# EAGLE board ZEGAR_WS2812 (EAGLE 9.6.0)
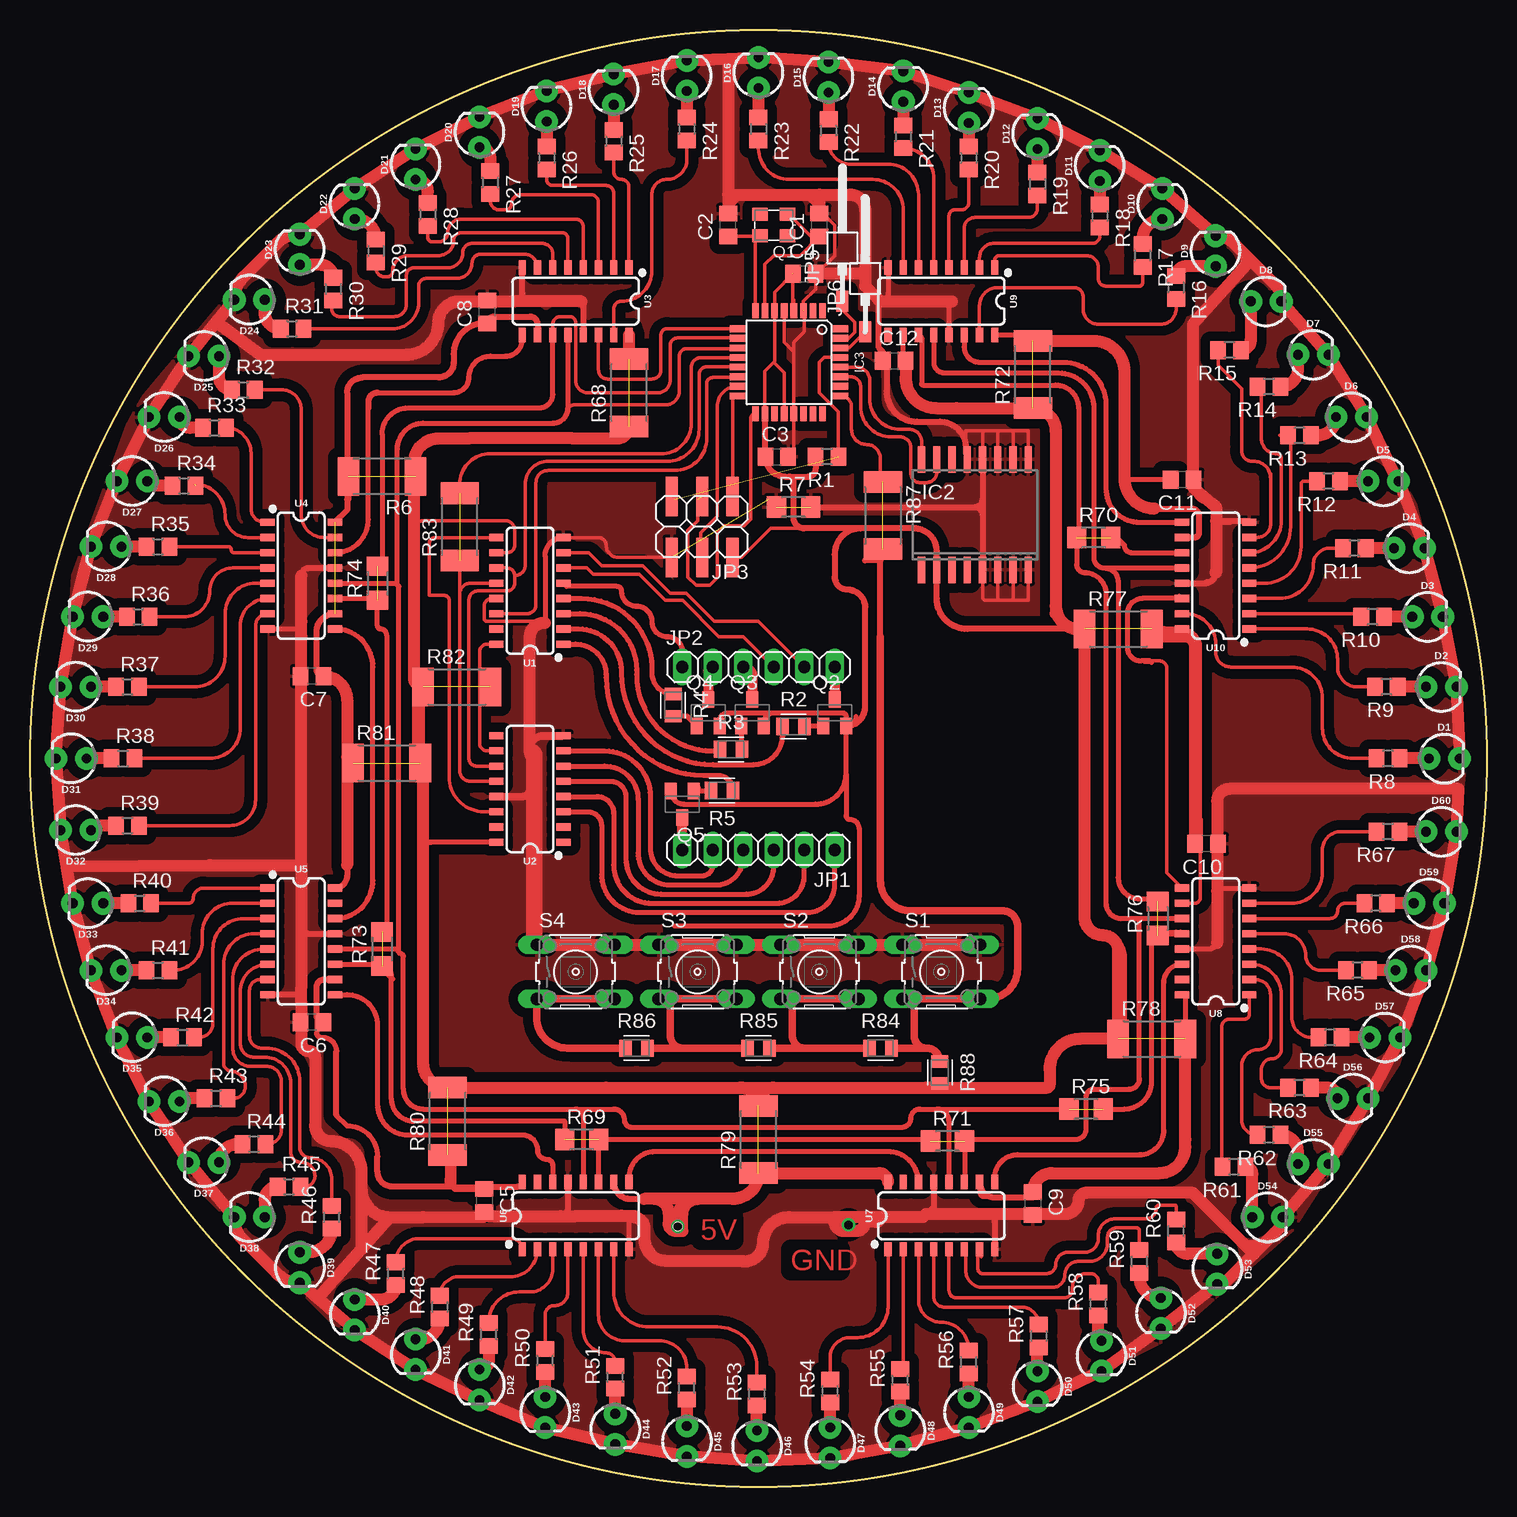
[diagram p0: board, top side]
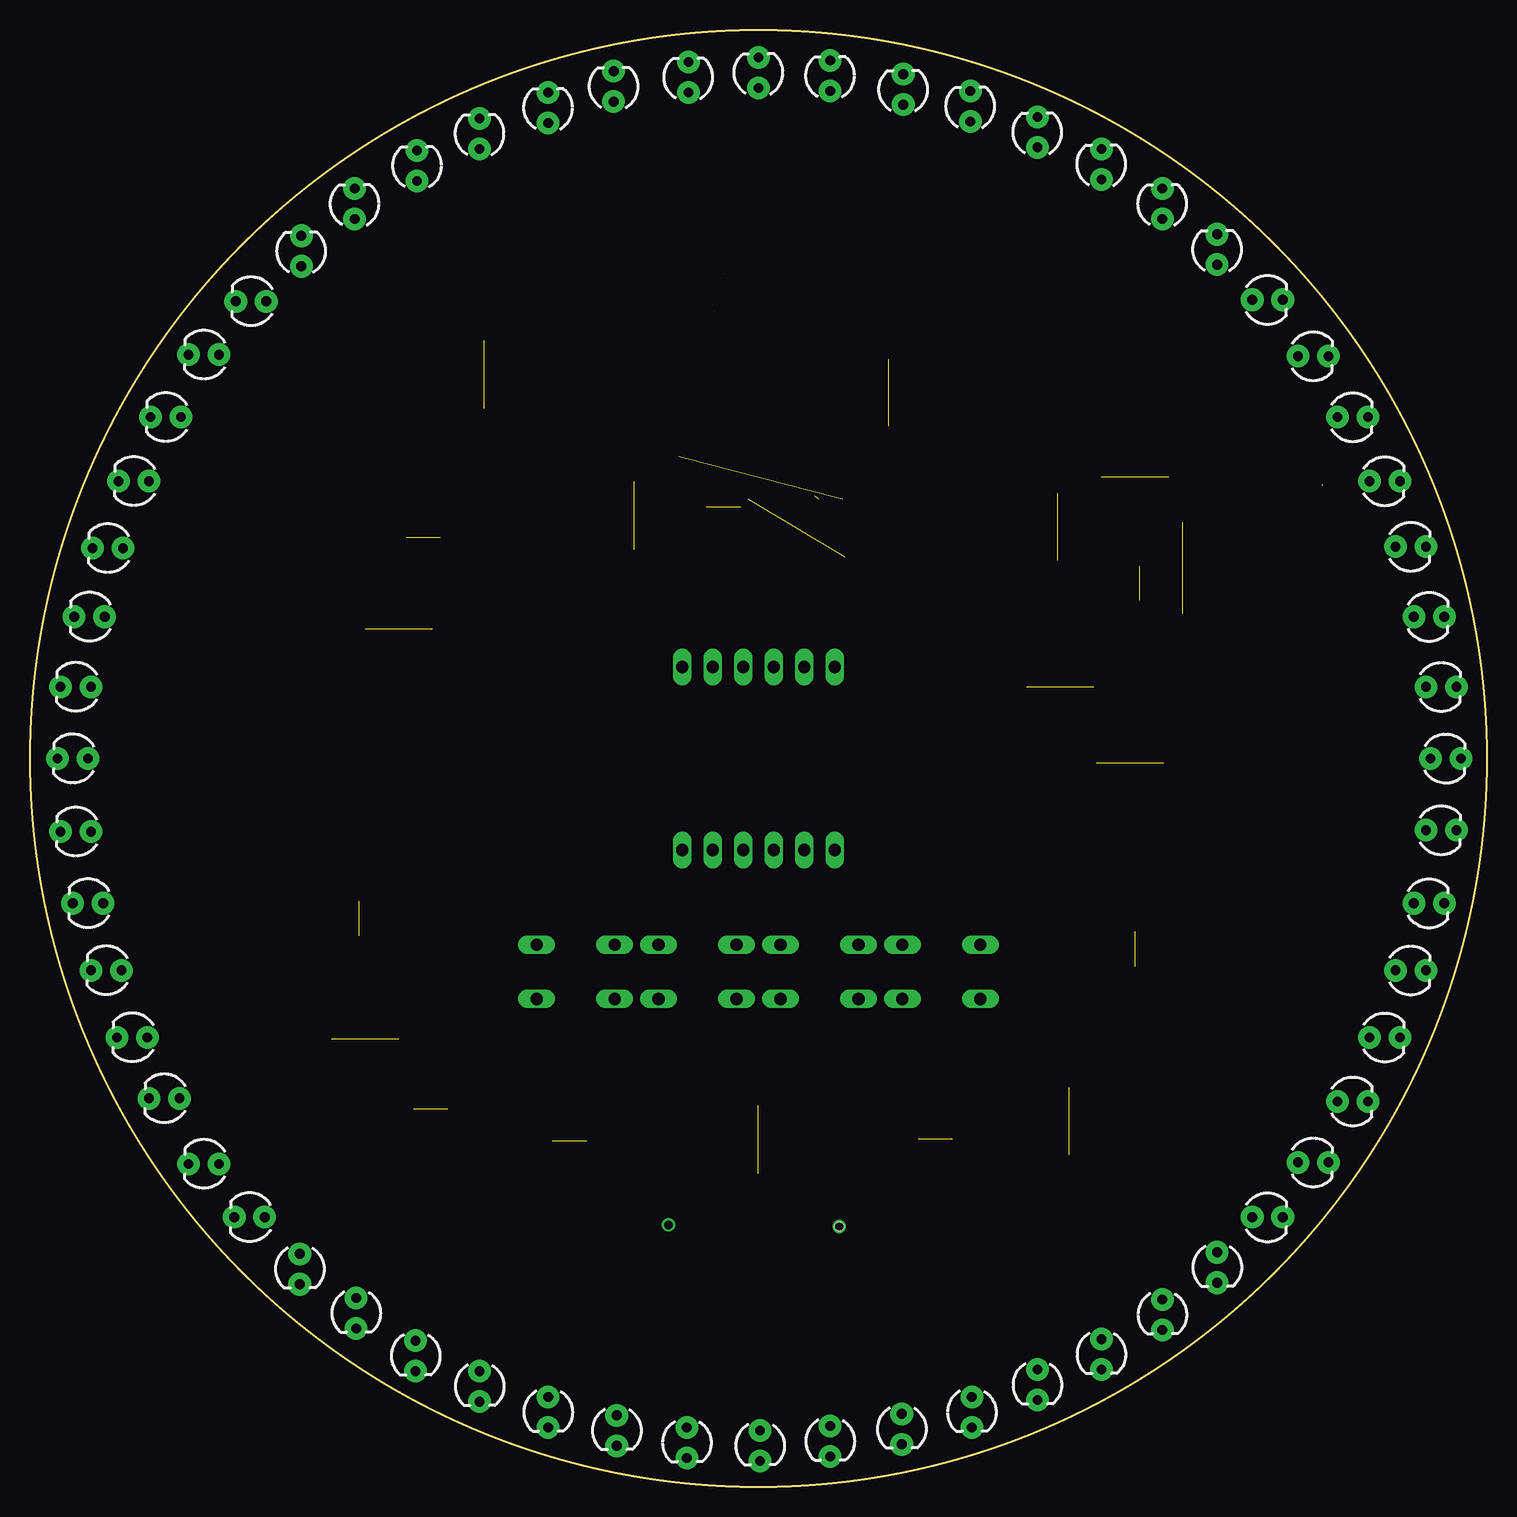
[diagram p1: board, bottom side, seen from below]

Size 121.42 x 121.42 mm. Coordinates in mm from the lower left corner, seen from the top.
Outline: circle at 60.71,60.71 radius 60.71
Copper layers (1*16): Top 0.035mm / dielectric 1.5mm / Bottom 0.035mm
Design rules "default": minimum track width 6mil, minimum drill 0.35mm, track to track 6mil, track to pad 6mil, pad to pad 6mil, via to via 6mil, smd to smd 6mil, copper to edge 40mil, drill to drill 6mil, minimum pad ring 10mil, minimum via ring 8mil, stop-mask expansion 4mil, vias tented up to drill 0mil, thermal gap 10mil
Holes 0.7 mm at 53.98,21.72

## Footprints (pad centres in the part's own frame; a part is rotated, then mirrored left to right if it is on the bottom)
C0805 = smd 1.3 x 1.5: 1 -0.95,0; 2 0.95,0
LED_3MM = drill 0.813 pad 1.88: A -1.27,0; K 1.27,0
SO16W = smd 0.6 x 2.2: 1 -4.445,-4.6; 2 -3.175,-4.6; 3 -1.905,-4.6; 4 -0.635,-4.6; 5 0.635,-4.6; 6 1.905,-4.6; 7 3.175,-4.6; 8 4.445,-4.6; 9 4.445,4.6; 10 3.175,4.6; 11 1.905,4.6; 12 0.635,4.6; 13 -0.635,4.6; 14 -1.905,4.6; 15 -3.175,4.6; 16 -4.445,4.6
TQFP32-08 = smd 1.27 x 0.559: 1 -4.293,2.8; 2 -4.293,2; 3 -4.293,1.2; 4 -4.293,0.4; 5 -4.293,-0.4; 6 -4.293,-1.2; 7 -4.293,-2; 8 -4.293,-2.8; 17 4.293,-2.8; 18 4.293,-2; 19 4.293,-1.2; 20 4.293,-0.4; 21 4.293,0.4; 22 4.293,1.2; 23 4.293,2; 24 4.293,2.8 | smd 0.559 x 1.27: 9 -2.8,-4.293; 10 -2,-4.293; 11 -1.2,-4.293; 12 -0.4,-4.293; 13 0.4,-4.293; 14 1.2,-4.293; 15 2,-4.293; 16 2.8,-4.293; 25 2.8,4.293; 26 2,4.293; 27 1.2,4.293; 28 0.4,4.293; 29 -0.4,4.293; 30 -1.2,4.293; 31 -2,4.293; 32 -2.8,4.293
1X06 = drill 1.016 long: 1 -6.35,0; 2 -3.81,0; 3 -1.27,0; 4 1.27,0; 5 3.81,0; 6 6.35,0
2X03SMD = smd 1.016 x 3.302: 1 -1.27,-3.81; 2 -1.27,1.27; 3 1.27,-3.81; 4 1.27,1.27; 5 3.81,-3.81; 6 3.81,1.27
1X01SMD/90 = smd 1.016 x 1.778: 1 -1.27,-5.08
3.2X2.5_KX-7 = smd 1.3 x 1.1: 1 -1.15,-0.9; 2 1.15,-0.9; 3 1.15,0.9; 4 -1.15,0.9
SOT23-BEC = smd 1 x 1.4: B -0.95,-1.1; C 0,1.1; E 0.95,-1.1
R0805 = smd 1.3 x 1.5: 1 -0.95,0; 2 0.95,0
RESC2012X65 = smd 1.031 x 1.42: 1 -0.919,0; 2 0.919,0
R2512 = smd 1.8 x 3.2: 1 -2.8,0; 2 2.8,0
R1206 = smd 1.6 x 1.803: 1 -1.422,0; 2 1.422,0
B3F-10XX = drill 1.016 long: 1 -3.251,2.261; 2 3.251,2.261; 3 -3.251,-2.261; 4 3.251,-2.261
SO16 = smd 0.6 x 1.2: 1 -4.445,-2.8; 2 -3.175,-2.8; 3 -1.905,-2.8; 4 -0.635,-2.8; 5 0.635,-2.8; 6 1.905,-2.8; 7 3.175,-2.8; 8 4.445,-2.8; 9 4.445,2.8; 10 3.175,2.8; 11 1.905,2.8; 12 0.635,2.8; 13 -0.635,2.8; 14 -1.905,2.8; 15 -3.175,2.8; 16 -4.445,2.8

## Placement (x,y rotation side)
C1  22p  [C0805]  65.79,105.16 90 top
C2  22p  [C0805]  58.17,105.16 90 top
C3  100n  [C0805]  62.23,85.85 0 top
C4  100n  [C0805]  64.52,101.09 0 top
C5  100n  [C0805]  37.85,23.88 270 top
C6  100n  [C0805]  23.5,38.74 180 top
C7  100n  [C0805]  23.5,67.57 180 top
C8  100n  [C0805]  38.1,97.92 90 top
C9  100n  [C0805]  83.57,23.62 270 top
C10  100n  [C0805]  98.05,53.6 180 top
C11  100n  [C0805]  96.01,83.95 180 top
C12  100n  [C0805]  72.01,93.86 0 top
D1  [LED_3MM]  117.86,60.71 0 top
D2  [LED_3MM]  117.6,66.68 0 top
D3  [LED_3MM]  116.46,72.52 0 top
D4  [LED_3MM]  114.94,78.23 0 top
D5  [LED_3MM]  112.78,83.82 0 top
D6  [LED_3MM]  110.11,89.16 0 top
D7  [LED_3MM]  106.94,94.36 0 top
D8  [LED_3MM]  103,98.81 0 top
D9  [LED_3MM]  98.81,103 90 top
D10  [LED_3MM]  94.36,106.94 90 top
D11  [LED_3MM]  89.16,110.11 90 top
D12  [LED_3MM]  83.95,112.78 90 top
D13  [LED_3MM]  78.23,114.94 90 top
D14  [LED_3MM]  72.77,116.72 90 top
D15  [LED_3MM]  66.55,117.48 90 top
D16  [LED_3MM]  60.71,117.86 90 top
D17  [LED_3MM]  54.74,117.6 90 top
D18  [LED_3MM]  48.64,116.46 90 top
D19  [LED_3MM]  43.06,115.06 90 top
D20  [LED_3MM]  37.47,112.91 90 top
D21  [LED_3MM]  32.13,110.24 90 top
D22  [LED_3MM]  27.05,106.94 90 top
D23  [LED_3MM]  22.48,103.13 90 top
D24  [LED_3MM]  18.29,98.94 180 top
D25  [LED_3MM]  14.48,94.24 180 top
D26  [LED_3MM]  11.18,89.16 180 top
D27  [LED_3MM]  8.51,83.82 180 top
D28  [LED_3MM]  6.35,78.36 180 top
D29  [LED_3MM]  4.83,72.52 180 top
D30  [LED_3MM]  3.81,66.68 180 top
D31  [LED_3MM]  3.43,60.71 180 top
D32  [LED_3MM]  3.81,54.74 180 top
D33  [LED_3MM]  4.83,48.64 180 top
D34  [LED_3MM]  6.35,43.06 180 top
D35  [LED_3MM]  8.51,37.47 180 top
D36  [LED_3MM]  11.18,32.13 180 top
D37  [LED_3MM]  14.48,27.05 180 top
D38  [LED_3MM]  18.29,22.48 180 top
D39  [LED_3MM]  22.48,18.29 270 top
D40  [LED_3MM]  27.05,14.35 270 top
D41  [LED_3MM]  32.13,11.05 270 top
D42  [LED_3MM]  37.47,8.51 270 top
D43  [LED_3MM]  42.93,6.23 270 top
D44  [LED_3MM]  48.77,4.83 270 top
D45  [LED_3MM]  54.74,3.81 270 top
D46  [LED_3MM]  60.58,3.43 270 top
D47  [LED_3MM]  66.68,3.69 270 top
D48  [LED_3MM]  72.52,4.7 270 top
D49  [LED_3MM]  78.23,6.23 270 top
D50  [LED_3MM]  83.95,8.38 270 top
D51  [LED_3MM]  89.28,10.92 270 top
D52  [LED_3MM]  94.24,14.48 270 top
D53  [LED_3MM]  98.94,18.16 270 top
D54  [LED_3MM]  103.13,22.48 0 top
D55  [LED_3MM]  106.94,26.93 0 top
D56  [LED_3MM]  110.24,32.39 0 top
D57  [LED_3MM]  112.91,37.47 0 top
D58  [LED_3MM]  115.06,43.06 0 top
D59  [LED_3MM]  116.59,48.64 0 top
D60  [LED_3MM]  117.6,54.61 0 top
IC2  DS3231/SO  [SO16W]  78.74,81.03 0 top
IC3  ATMEGA328P  [TQFP32-08]  63.25,93.73 270 top
JP1  [1X06]  60.71,53.09 180 top
JP2  [1X06]  60.71,68.33 0 top
JP3  [2X03SMD]  57.28,78.74 180 top
JP5  [1X01SMD/90]  68.96,103.89 0 top
JP6  [1X01SMD/90]  70.87,101.35 0 top
Q1  [3.2X2.5_KX-7]  61.98,105.16 180 top
Q2  MMBT3906LT1SMD  [SOT23-BEC]  67.06,64.52 0 top
Q3  MMBT3906LT1SMD  [SOT23-BEC]  60.2,64.52 0 top
Q4  MMBT3906LT1SMD  [SOT23-BEC]  56.52,64.52 0 top
Q5  MMBT3906LT1SMD  [SOT23-BEC]  54.36,56.9 180 top
R1  10K  [R0805]  66.42,85.85 180 top
R2  4k7  [RESC2012X65]  63.63,63.38 0 top
R3  4k7  [RESC2012X65]  58.42,61.47 0 top
R4  4k7  [RESC2012X65]  53.6,65.15 270 top
R5  4k7  [RESC2012X65]  57.66,58.04 180 top
R6  0  [R2512]  29.34,84.2 180 top
R7  0  [R1206]  63.63,81.66 0 top
R8  220  [R0805]  113.16,60.71 180 top
R9  220  [R0805]  113.03,66.68 180 top
R10  220  [R0805]  111.89,72.52 180 top
R11  220  [R0805]  110.37,78.23 180 top
R12  220  [R0805]  108.21,83.82 180 top
R13  220  [R0805]  105.79,87.63 180 top
R14  220  [R0805]  103.25,91.7 180 top
R15  220  [R0805]  99.95,94.74 180 top
R16  220  [R0805]  95.51,99.95 270 top
R17  220  [R0805]  92.71,102.62 270 top
R18  220  [R0805]  89.16,105.92 270 top
R19  220  [R0805]  83.95,108.59 270 top
R20  220  [R0805]  78.23,110.75 270 top
R21  220  [R0805]  72.77,112.52 270 top
R22  220  [R0805]  66.55,113.03 270 top
R23  220  [R0805]  60.71,113.16 270 top
R24  220  [R0805]  54.74,113.16 270 top
R25  220  [R0805]  48.64,112.14 270 top
R26  220  [R0805]  43.06,110.75 270 top
R27  220  [R0805]  38.36,108.71 270 top
R28  220  [R0805]  33.15,106.05 270 top
R29  220  [R0805]  28.83,103 270 top
R30  220  [R0805]  25.28,99.82 270 top
R31  220  [R0805]  21.85,96.52 0 top
R32  220  [R0805]  17.78,91.44 0 top
R33  220  [R0805]  15.37,88.27 0 top
R34  220  [R0805]  12.83,83.44 0 top
R35  220  [R0805]  10.67,78.36 0 top
R36  220  [R0805]  9.02,72.52 0 top
R37  220  [R0805]  8.13,66.68 0 top
R38  220  [R0805]  7.75,60.71 0 top
R39  220  [R0805]  8.13,55.12 0 top
R40  220  [R0805]  9.15,48.64 0 top
R41  220  [R0805]  10.67,43.06 0 top
R42  220  [R0805]  12.7,37.47 0 top
R43  220  [R0805]  15.5,32.39 0 top
R44  220  [R0805]  18.67,28.58 0 top
R45  220  [R0805]  21.59,25.02 0 top
R46  220  [R0805]  25.15,22.48 90 top
R47  220  [R0805]  30.48,17.78 90 top
R48  220  [R0805]  34.17,14.99 90 top
R49  220  [R0805]  38.23,12.7 90 top
R50  220  [R0805]  42.93,10.54 90 top
R51  220  [R0805]  48.77,9.15 90 top
R52  220  [R0805]  54.74,8.26 90 top
R53  220  [R0805]  60.58,7.75 90 top
R54  220  [R0805]  66.68,8 90 top
R55  220  [R0805]  72.52,8.89 90 top
R56  220  [R0805]  78.23,10.42 90 top
R57  220  [R0805]  84.08,12.58 90 top
R58  220  [R0805]  89.03,15.24 90 top
R59  220  [R0805]  92.46,18.8 90 top
R60  220  [R0805]  95.51,21.34 90 top
R61  220  [R0805]  100.33,26.67 180 top
R62  220  [R0805]  103.25,29.34 180 top
R63  220  [R0805]  105.79,33.28 180 top
R64  220  [R0805]  108.33,37.47 180 top
R65  220  [R0805]  110.62,43.06 180 top
R66  220  [R0805]  112.14,48.64 180 top
R67  220  [R0805]  113.16,54.61 180 top
R68  0  [R2512]  49.91,91.19 90 top
R69  0  [R1206]  45.98,28.96 0 top
R70  0  [R1206]  88.65,79.12 0 top
R71  0  [R1206]  76.46,28.83 0 top
R72  0  [R2512]  83.57,92.71 90 top
R73  0  [R1206]  29.34,44.83 90 top
R74  0  [R1206]  28.96,75.31 90 top
R75  0  [R1206]  88.01,31.5 0 top
R76  0  [R1206]  93.98,47.37 90 top
R77  0  [R2512]  90.68,71.5 0 top
R78  0  [R2512]  93.47,37.34 0 top
R79  0  [R2512]  60.71,28.96 90 top
R80  0  [R2512]  34.8,30.48 90 top
R81  0  [R2512]  29.72,60.33 0 top
R82  0  [R2512]  35.56,66.68 0 top
R83  0  [R2512]  35.82,80.01 90 top
R84  1k  [RESC2012X65]  70.87,36.58 0 top
R85  1k  [RESC2012X65]  60.71,36.58 0 top
R86  1k  [RESC2012X65]  50.55,36.58 0 top
R87  0  [R2512]  71.07,80.95 270 top
R88  1k  [RESC2012X65]  75.82,34.55 270 top
S1  [B3F-10XX]  75.95,42.93 0 top
S2  [B3F-10XX]  65.79,42.93 0 top
S3  [B3F-10XX]  55.63,42.93 0 top
S4  [B3F-10XX]  45.47,42.93 0 top
U1  SN74HC595D  [SO16]  41.66,74.68 90 top
U2  SN74HC595D  [SO16]  41.66,58.17 90 top
U3  SN74HC595D  [SO16]  45.47,98.81 180 top
U4  SN74HC595D  [SO16]  22.61,75.95 270 top
U5  SN74HC595D  [SO16]  22.61,45.47 270 top
U6  SN74HC595D  [SO16]  45.47,22.61 0 top
U7  SN74HC595D  [SO16]  75.95,22.61 0 top
U8  SN74HC595D  [SO16]  98.81,45.47 90 top
U9  SN74HC595D  [SO16]  75.95,98.81 180 top
U10  SN74HC595D  [SO16]  98.81,75.95 90 top

## Library data of the parts
C1-C12 = rcl; SPICEPREFIX: C
D1-D60 = SparkFun-LED; PROD_ID: DIO-08794
IC2 = adafruit
IC3 = IC_Embedded; CATEGORY: IC_Embedded; MANUFACTURER: Microchip; MPN: ATmega328P-MMH; OPERATING_TEMP: -40 to 85 °C; PART_STATUS: Active; SUB-CATEGORY: Microcontroller
JP1 JP2 = pinhead
JP3 JP5 JP6 = pinhead-2
Q1 = crystal-geyer_V1_0
Q2-Q5 = transistor-pnp
R1 R6-R83 R87 = rcl; SPICEPREFIX: R
R2-R5 R84-R86 R88 = Resistor; CATEGORY: Resistor; SUB-CATEGORY: Fixed
S1-S4 = switch-omron; MPN: B3F-1000; OC_FARNELL: 176432; OC_NEWARK: 36M3542
U1-U10 = SparkFun-IC-Logic; PROD_ID: IC-07875

## Nets
4DIG_1: JP2.6 Q2.C
4DIG_1IN: R2.1 U1.2
4DIG_2: JP2.3 Q3.C
4DIG_2IN: R3.1 U1.3
4DIG_3: JP2.2 Q4.C
4DIG_3IN: R4.1 U1.4
4DIG_4: JP1.6 Q5.C
4DIG_4IN: R5.1 U1.1
4DIG_A: JP2.5 U1.7
4DIG_B: JP2.1 U1.5
4DIG_C: JP1.4 U2.6
4DIG_CLK: IC3.13 U1.11 U2.11
4DIG_D: JP1.2 U2.4
4DIG_DP: JP1.3 U2.5
4DIG_E: JP1.1 U2.3
4DIG_F: JP2.4 U1.6
4DIG_G: JP1.5 U2.7
4DIG_LATCH: IC3.12 R83.1 R83.2 U1.12 U2.12
4DIG_SER: IC3.14 U1.14
5VCC: C3.1 C4.1 C5.1 C6.1 C7.1 C8.1 C9.1 C10.2 C11.2 C12.2 IC2.2 IC3.4 IC3.6 IC3.18 IC3.20 JP3.2 Q2.E Q3.E Q4.E Q5.E R1.2 R6.1 R6.2 R68.1 R68.2 R72.1 R72.2 R77.1 R77.2 R78.1 R78.2 R79.1 R79.2 R80.1 R80.2 R81.1 R81.2 R82.1 R82.2 R88.2 U1.10 U1.16 U2.10 U2.16 U3.10 U3.16 U4.10 U4.16 U5.10 U5.16 U6.10 U6.16 U7.10 U7.16 U8.10 U8.16 U9.10 U9.16 U10.10 U10.16
BUTTONS: IC3.25 R84.2 R87.1 R87.2 R88.1 S1.3 S1.4
GND: C1.2 C2.2 C3.2 C4.2 C5.2 C6.2 C7.2 C8.2 C9.2 C10.1 C11.1 C12.1 D1.K D2.K D3.K D4.K D5.K D6.K D7.K D8.K D9.K D10.K D11.K D12.K D13.K D14.K D15.K D16.K D17.K D18.K D19.K D20.K D21.K D22.K D23.K D24.K D25.K D26.K D27.K D28.K D29.K D30.K D31.K D32.K D33.K D34.K D35.K D36.K D37.K D38.K D39.K D40.K D41.K D42.K D43.K D44.K D45.K D46.K D47.K D48.K D49.K D50.K D51.K D52.K D53.K D54.K D55.K D56.K D57.K D58.K D59.K D60.K IC2.5 IC2.6 IC2.7 IC2.8 IC2.9 IC2.10 IC2.11 IC2.12 IC2.13 IC3.3 IC3.5 IC3.21 JP3.6 R7.1 R7.2 S1.1 S1.2 S2.1 S2.2 S3.1 S3.2 S4.1 S4.2 U1.8 U1.13 U2.8 U2.13 U3.8 U3.13 U4.8 U4.13 U5.8 U5.13 U6.8 U6.13 U7.8 U7.13 U8.8 U8.13 U9.8 U9.13 U10.8 U10.13
MISO: IC3.16 JP3.1
MOSI: IC3.15 JP3.4
N$1: U1.9 U2.14
N$2: U9.14 U10.9
N$4: R8.2 U10.15
N$5: R9.2 U10.1
N$6: R10.2 U10.2
N$7: R11.2 U10.3
N$8: R12.2 U10.4
N$9: R13.2 U10.5
N$10: U7.9 U8.14
N$11: U6.9 U7.14
N$12: U5.9 U6.14
N$13: U4.9 U5.14
N$14: U3.9 U4.14
N$15: R14.2 U10.6
N$16: R15.2 U10.7
N$17: R16.2 U9.15
N$18: Q2.B R2.2
N$19: Q3.B R3.2
N$20: Q4.B R4.2
N$21: Q5.B R5.2
N$22: R17.2 U9.1
N$23: R18.2 U9.2
N$24: R19.2 U9.3
N$25: R20.2 U9.4
N$26: R21.2 U9.5
N$27: R22.2 U9.6
N$28: R23.2 U9.7
N$29: R24.2 U3.15
N$30: R25.2 U3.1
N$31: R26.2 U3.2
N$32: R27.2 U3.3
N$33: R28.2 U3.4
N$34: R29.2 U3.5
N$35: R30.2 U3.6
N$36: R31.2 U3.7
N$37: R32.2 U4.15
N$38: R33.2 U4.1
N$39: R34.2 U4.2
N$40: R35.2 U4.3
N$41: R36.2 U4.4
N$42: R37.2 U4.5
N$43: R38.2 U4.6
N$44: R39.2 U4.7
N$45: R47.2 U6.1
N$46: R40.2 U5.1
N$47: R41.2 U5.2
N$48: R42.2 U5.3
N$49: R43.2 U5.4
N$50: R44.2 U5.5
N$51: R45.2 U5.6
N$52: R46.2 U5.7
N$53: R48.2 U6.2
N$54: R49.2 U6.3
N$55: R50.2 U6.4
N$56: R51.2 U6.5
N$57: R52.2 U6.6
N$58: R53.2 U6.7
N$59: R54.2 U7.1
N$60: R55.2 U7.2
N$61: R56.2 U7.3
N$62: R57.2 U7.4
N$63: R58.2 U7.5
N$64: R59.2 U7.6
N$65: R60.2 U7.7
N$66: R61.2 U8.1
N$67: R62.2 U8.2
N$68: R63.2 U8.3
N$69: R64.2 U8.4
N$70: R65.2 U8.5
N$71: R66.2 U8.6
N$72: R67.2 U8.7
N$73: D1.A R8.1
N$74: D2.A R9.1
N$75: D4.A R11.1
N$76: D3.A R10.1
N$77: D7.A R14.1
N$78: D5.A R12.1
N$79: D6.A R13.1
N$80: D8.A R15.1
N$81: D9.A R16.1
N$82: D12.A R19.1
N$83: D15.A R22.1
N$84: D17.A R24.1
N$85: D18.A R25.1
N$86: D19.A R26.1
N$87: D10.A R17.1
N$88: D13.A R20.1
N$89: D11.A R18.1
N$90: D16.A R23.1
N$91: D14.A R21.1
N$92: D23.A R30.1
N$93: D22.A R29.1
N$94: D21.A R28.1
N$95: D20.A R27.1
N$96: D24.A R31.1
N$97: D25.A R32.1
N$98: D26.A R33.1
N$99: D27.A R34.1
N$100: D28.A R35.1
N$101: D29.A R36.1
N$102: D30.A R37.1
N$103: D31.A R38.1
N$104: D32.A R39.1
N$105: D33.A R40.1
N$106: D34.A R41.1
N$107: D35.A R42.1
N$108: D36.A R43.1
N$109: D37.A R44.1
N$110: D38.A R45.1
N$111: D39.A R46.1
N$112: D40.A R47.1
N$113: D41.A R48.1
N$114: D42.A R49.1
N$115: D43.A R50.1
N$116: D44.A R51.1
N$117: D45.A R52.1
N$118: D46.A R53.1
N$119: D47.A R54.1
N$120: D48.A R55.1
N$121: D49.A R56.1
N$122: D50.A R57.1
N$123: D51.A R58.1
N$124: D52.A R59.1
N$125: D53.A R60.1
N$126: D54.A R61.1
N$127: D55.A R62.1
N$128: D56.A R63.1
N$129: D57.A R64.1
N$130: D60.A R67.1
N$131: D59.A R66.1
N$132: D58.A R65.1
N$133: U9.9
N$135: IC3.30 JP6.1
N$136: IC3.31 JP5.1
N$138: R84.1 R85.2 S2.3 S2.4
N$139: R85.1 R86.2 S3.3 S3.4
N$140: R86.1 S4.3 S4.4
RESET: IC3.29 JP3.5 R1.1
SCK: IC3.17 JP3.3
SCL: IC2.16 IC3.28
SDA: IC2.15 IC3.27
SEC_CLK: IC3.10 R69.1 R69.2 R70.1 R70.2 R71.1 R71.2 R73.1 R73.2 R74.1 R74.2 U3.11 U4.11 U5.11 U6.11 U7.11 U8.11 U9.11 U10.11
SEC_LATCH: IC3.11 R75.1 R75.2 R76.1 R76.2 U3.12 U4.12 U5.12 U6.12 U7.12 U8.12 U9.12 U10.12
SEC_SER: IC3.9 U3.14
SEC_SERIAL: U8.9 U10.14
VBAT: IC2.14
XTAL1: C1.1 IC3.7 Q1.1
XTAL2: C2.1 IC3.8 Q1.3

## Tracks (layer width: path | path; a pad name or v marks a point on that pad's centre or on a via)
4DIG_1
  Top 0.813: JP2.6 Q2.C
4DIG_1IN
  Top 0.406: 62.71,62.52 R2.1 62.71,62.61 arc-90 60.3,60.2 56.9,60.2 arc-90 49.28,67.82 49.28,67.95 arc90 45.72,71.5 U1.2
4DIG_2
  Top 0.813: JP2.3 arc-90 60.2,67.57 Q3.C
4DIG_2IN
  Top 0.406: R3.1 arc-90 57.38,61.34 56.9,61.34 arc-90 50.55,67.69 50.55,68.07 arc90 45.85,72.77 U1.3
4DIG_3
  Top 0.406: JP2.2 arc90 56.52,67.95 | 56.52,65.79 Q4.C
  Top 0.813: JP2.2 arc90 56.52,67.95 56.52,65.79
4DIG_3IN
  Top 0.406: U1.4 45.98,74.04 arc-90 51.82,68.2 51.82,67.85 arc90 R4.1
4DIG_4
  Top 0.813: JP1.6 Q5.C
4DIG_4IN
  Top 0.406: R5.1 arc90 57.31,59.31 56.14,59.31 arc-90 48.01,67.44 48.01,67.69 arc90 45.47,70.23 U1.1
4DIG_A
  Top 0.305: JP2.5 60.71,72.14 57.03,72.14 54.69,74.48 53.37,74.48 51.08,76.76 47.64,76.76 46.55,77.85 U1.7
  Top 0.406: 64.52,69.6 JP2.5
4DIG_B
  Top 0.406: U1.5 44.71,75.06 48.9,75.06 arc-90 49.28,74.68 arc90 50.55,73.41 arc-90 51.82,72.14 arc90 53.09,70.87 arc-90 54.36,69.6 JP2.1
4DIG_C
  Top 0.406: JP1.4 59.44,52.45 arc-90 57.15,50.17 53.34,50.17 arc-90 50.68,52.83 50.68,57.28 arc90 47.88,60.07 U2.6
4DIG_CLK
  Top 0.305: U2.11 37.21,60.07 arc-90 36.58,60.71 36.58,73.92 arc-90 37.34,74.68 39.75,74.68 arc90 40.39,75.31 40.39,75.95 | 40.39,75.95 arc90 39.75,76.58 U1.11 | 40.39,75.95 arc90 41.28,76.84 41.28,83.57 | 41.28,83.57 41.28,83.82 | 41.28,83.57 arc-90 43.18,85.47 53.09,85.47 arc90 55.76,88.14 55.76,92.71 arc-90 56.39,93.35 58.94,93.35 arc-90 IC3.13
4DIG_D
  Top 0.406: JP1.2 64.52,50.93 arc-90 62.23,48.64 51.82,48.64 arc-90 48.64,51.82 48.64,56.14 arc90 47.25,57.53 U2.4
4DIG_DP
  Top 0.406: JP1.3 61.98,51.69 arc-90 59.69,49.41 52.58,49.41 arc-90 49.66,52.33 49.66,57.53 arc90 48.39,58.8 U2.5
4DIG_E
  Top 0.406: JP1.1 67.06,50.17 arc-90 64.77,47.88 50.8,47.88 arc-90 47.63,51.06 47.63,55.12 arc90 46.48,56.26 U2.3
4DIG_F
  Top 0.305: U1.6 46.41,76.58 46.95,76.05 50.77,76.05 52.93,73.89 54.38,73.89 57.41,70.87 59.44,70.87 JP2.4
4DIG_G
  Top 0.406: JP1.5 56.9,51.82 arc-90 56.01,50.93 53.98,50.93 arc-90 51.69,53.22 51.69,57.53 arc90 47.88,61.34 U2.7
4DIG_LATCH  (1 unrouted)
  Top 0.305: 35.82,74.42 arc-90 36.71,75.31 U1.12 | 35.82,74.42 35.82,59.69 arc90 36.71,58.8 U2.12 | 35.82,74.42 R83.1 | R83.2 35.82,83.57 arc-90 38.36,86.11 52.58,86.11 arc90 55.12,88.65 55.12,93.35 arc-90 55.88,94.11 56.9,94.11 57.53,94.11 58.94,94.11 arc90 IC3.12
4DIG_SER
  Top 0.305: U1.14 41.4,72.77 arc90 42.17,73.54 42.17,83.7 arc-90 43.18,84.71 53.72,84.71 arc90 56.39,87.38 56.39,91.95 arc-90 56.9,92.46 58.89,92.46 arc90 IC3.14
5VCC  (11 unrouted)
  Top 0.305: IC3.18 61.25,93 61.98,93.73 | 61.98,93.73 62.05,93.8 IC3.6 62.05,99.57 C4.1 63.57,98.1 63.63,98.04 | IC3.20 62.85,92.86 61.98,93.73 | IC3.4 63.63,98.04 | 63.63,98.04 63.63,98.94 | C3.1 61.25,85.89 61.25,86.11 | U10.16 arc-90 97.54,69.97 97.54,55.63 97.54,49.15 arc-90 97.03,48.64 U8.10 | U7.10 79.12,24.51 arc90 79.5,24.13 83.57,24.13 | 96.27,28.96 | 93.73,26.42 arc-90 93.48,26.16 | 96.27,36.58 R78.2 | C9.1 83.79,24.8 83.7,24.89 arc-90 84.97,26.16 93.48,26.16 | 94.11,26.16 93.48,26.16 | U6.10 48.64,25.15 arc90 49.79,24.01 50.55,24.01 | 38.1,61.34 arc-90 37.47,61.98 | U1.16 38.1,70.23 arc90 37.47,69.6 37.47,67.57 | U2.10 38.1,61.34 | 38.1,61.34 arc-90 37.47,61.98 | 37.47,61.98 37.47,67.57 | R82.1 arc-90 R82.1 32.77,60.58 | R82.2 arc-90 37.47,67.57 | U1.10 39.75,77.85 arc90 40.39,78.49 40.39,79.76 arc90 39.63,80.52 32.77,80.52 arc90 32.01,79.76 | R81.2 32.52,66.54 arc90 32.01,67.06 | R82.1 arc90 32.45,66.37 | R81.2 arc-90 32.01,60.84 | R82.1 arc90 32.45,66.37 | 32.45,66.37 32.45,65.79 | R81.2 arc-90 32.45,60.39 | R81.2 arc-90 32.45,60.39 | R81.2 arc-90 32.45,60.39 | R82.1 arc90 32.01,65.92 32.01,61.72 | 74.68,33.28 arc-90 75.02,33.63 R88.2 | JP3.2 59.31,77.47 61.72,79.89 64.52,79.89
  Top 0.406: 27.69,92.46 arc90 26.42,91.19 | 34.04,92.46 arc90 35.31,93.73 | 41.66,97.54 arc-90 42.29,96.9 | 42.29,96.27 U3.10 | U5.16 arc90 26.42,50.92 | 26.42,51.82 26.42,59.83 arc-90 R81.1 arc-90 26.42,60.83 | U9.16 82.56,96.01 arc-90 83.57,95 R72.2 | 82.3,89.91 R72.1 arc-90 85.47,88.01 | 77.22,89.91 75.06,89.91 arc-90 72.77,92.2 | 72.77,92.2 U9.10 | 87.88,70.87 R77.1 86.74,71.5 | 87.88,47.13 87.88,47.51 arc90 89.41,45.98 arc-90 91.19,44.2 91.19,37.85 arc-90 R78.1 | U8.16 arc-90 96.27,40.76 R78.2 | 93.73,71.5 U10.16 | 85.47,72.77 arc-90 86.11,72.14 | 86.11,72.14 arc-90 85.47,72.77 | U6.10 arc90 50.05,24.01 | 50.55,24.01 51.18,24.01 | U5.10 25.15,42.29 | 24.51,42.29 arc90 23.88,41.66 | 25.53,36.32 arc90 24.39,37.47 24.26,37.47 arc-90 23.88,37.85 23.88,39.31 arc90 C6.1 | 25.53,30.99 26.42,30.1 arc-90 28.96,27.56 | 28.96,26.29 arc90 30.23,25.02 | 40.64,25.02 arc90 U6.16 | 37.66,25.02 38.04,25.02 arc90 C5.1 arc90 37.66,25.02 | 37.66,25.02 35.31,25.02 35.31,25.15 | R80.1 arc-90 35.31,27.17 | 49.27,33.28 48.01,33.28 | R80.2 arc-90 32.77,35.31 | R81.2 arc90 32.77,60.58 32.77,59.44 arc-90 32.52,59.69 R81.2 | 34.04,87.38 arc90 32.01,85.35 32.01,79.76 32.01,67.06 32.01,61.72 32.01,60.84 32.45,60.39 R81.2 | 36.58,87.38 45.47,87.38 | 53.41,58.49 Q5.E arc90 54.51,56.9 65.47,56.9 arc90 68.01,59.44 | 57.53,63.35 arc90 Q4.E 57.47,63.82 arc-90 58.17,64.52 61.98,64.52 | 85.47,72.77 arc90 86.74,71.5 | 86.11,72.14 arc90 86.74,71.5 | 68.01,59.44 68.01,63.38 | 68.01,63.38 Q2.E 68.01,64.2 arc90 67.69,64.52 61.98,64.52 | 68.84,64.2 arc-90 68.01,63.38 | Q3.E 61.15,63.69 arc-90 61.98,64.52 | U2.16 33.4,53.72 arc90 32.77,53.09 | U4.10 arc90 23.88,71.24
  Top 0.406: 23.88,68.14 arc90 C7.1 arc-90 26.42,65.6 | 35.31,94.43 arc-90 37.85,96.97 | C8.1 arc-90 38.67,97.54 | C9.1 83.57,24.13 | 97.54,55.63 97.54,54.04 arc-90 C10.2 | C11.2 91.32,83.95 arc-90 91.19,84.08 | 72.96,92.01 arc-90 72.77,92.2 | 68.01,59.44 68.01,55.95 arc90 68.33,55.63 arc-90 69.09,54.87 69.09,49.28 arc-90 66.55,46.74 53.72,46.74
  Top 0.508: 88.65,95.51 arc-90 91.19,92.97 | 91.19,84.08 arc90 93.73,81.54 96.78,81.54 arc-90 97.41,80.9 97.41,79.5 arc-90 97.03,79.12 U10.10 | U7.10 arc90 80.4,24.13 83.57,24.13 | U6.10 arc90 50.05,24.01 50.55,24.01 | 40.64,25.02 38.04,25.02 arc90 C5.1 35.5,24.83 arc-90 35.31,25.02 | R80.1 34.8,25.53 arc90 35.31,25.02 | R80.1 34.8,25.66 arc90 35.31,25.15 35.31,27.17 arc90 R80.1 | 35.31,25.02 30.23,25.02 arc-90 28.96,26.29 28.96,27.56 | 25.53,30.99 25.53,36.32 | C6.1 arc-90 23.88,39.31 23.88,41.66 arc-90 24.51,42.29 25.15,42.29 | 26.42,51.82 26.42,50.92 arc-90 U5.16 | C7.1 arc-90 23.88,68.14 23.88,71.24 arc-90 U4.10 | 26.42,82.3 26.42,91.19 arc-90 27.69,92.46 34.04,92.46 arc90 35.31,93.73 35.31,94.43 arc-90 37.85,96.97 C8.1 arc-90 38.67,97.54 41.66,97.54 arc-90 42.29,96.9 42.29,96.27 | 26.42,82.3 26.42,81.41 U4.16 | R77.2 94.36,71.5 arc-90 95,70.87 arc-90 95.63,71.5 U10.16 | R6.2 26.54,82.41 arc-90 26.42,82.3 | 87.38,71.5 78.11,71.5 arc-90 75.57,74.04 IC2.2 75.57,77.98 arc90 73.66,79.89 69.22,79.89 | 69.22,79.89 arc90 67.06,77.73 67.06,75.82 arc90 68.07,74.81 arc-90 69.6,73.28 | Q2.E arc90 69.6,65.01 69.6,73.28 | 69.6,73.28 69.6,73.41 | 69.22,79.89 64.52,79.89 arc-90 63.63,80.77 63.63,83.82 arc90 63.25,84.2 | C3.1 arc90 62.93,84.2 63.25,84.2 | 63.25,84.2 64.84,84.2 arc90 65.47,84.84 R1.2 | IC3.18 61.25,86.11
  Top 1.016: 59.18,33.28 48.01,33.28 R80.2 arc-90 32.77,35.31 32.77,53.09 32.77,59.44 | 59.18,33.28 arc-90 R79.2 60.71,32.01 arc-90 61.98,33.28 | 59.18,33.28 61.98,33.28 | 61.98,33.28 74.68,33.28 84.72,33.28 arc90 84.97,33.53 84.97,34.8 arc-90 87.51,37.34 R78.1 90.67,44.71 arc90 89.41,45.98 arc-90 87.88,47.51 87.88,70.87 | 55.63,24.01 58.56,24.01 arc90 R79.1 70.75,26.16 arc-90 U7.16 | 55.63,24.01 52.03,24.01 | 52.03,24.01 51.18,24.01 | R81.2 arc-90 32.45,60.39 32.45,65.79 | R82.1 arc-90 32.01,67.43 32.01,85.35 arc-90 34.04,87.38 36.58,87.38 45.22,87.38 | C9.1 arc-90 85.16,26.16 94.11,26.16 arc90 96.27,28.33 96.27,28.96 | 96.27,28.96 96.27,36.58 | C10.2 97.1,70.04 arc90 96.27,70.87 95,70.87 94.36,70.87 arc-90 93.73,71.5 | R72.1 arc-90 85.47,88.01 85.47,73.41 | 85.47,73.41 85.47,72.77 | R77.1 87.38,71.5 arc-90 85.47,73.41 | R72.2 88.65,95.51 arc-90 91.19,92.97 91.19,84.08 arc90 93.73,81.54 | 82.3,89.91 77.22,89.91 75.5,89.91 arc-90 72.96,92.45 C12.2 | 26.42,51.82 26.42,60.83 26.42,65.6 arc90 C7.1 | 45.47,87.38 48.9,87.38 arc90 R68.1 | U3.16 R68.2 | 53.95,22.33 arc-90 55.63,24.01 | 52.03,24.01 arc-90 53.22,22.82 53.22,21.97 arc90 53.85,21.34 54.36,21.34 54.36,22.74 arc-90 55.63,24.01
BUTTONS  (1 unrouted)
  Top 0.254: 70.81,84.02 arc90 R87.1
  Top 0.305: IC3.25 arc-90 68.46,90.01 68.46,88.14 arc90 69.73,86.87 arc-90 70.87,85.73 70.87,84.08 arc-90 70.81,84.02
  Top 0.508: 70.87,70.87 70.87,77.22 | 70.87,77.22 69.6,77.22 | R87.2 arc90 70.87,77.95 70.87,77.22
  Top 0.61: R84.2 74.68,36.58 | 74.68,36.58 74.71,36.58 arc-90 R88.1 | 74.68,36.58 arc-90 73.69,37.57 73.69,39.68 arc90 S1.3 S1.4 79.76,40.67 arc90 82.3,43.21 82.3,46.74 arc90 81.03,48.01 73.41,48.01 arc-90 70.87,50.55 70.87,70.87
GND  (3 unrouted)
  Top 0.305: IC3.5 62.85,95.4 63.65,94.6 | 63.65,94.6 IC3.21 63.65,86.32 C3.2 | 63.65,94.6 63.65,95.4 64.52,96.27 64.52,97.95 IC3.3 64.45,98.81 65.47,99.83 C4.2 | C2.2 58.17,106.43 59.44,107.7 64.52,107.7 65.79,106.43 C1.2 66.11,106.11 67.06,105.16 67.06,102.62 65.53,101.09 C4.2 | C4.2 66.68,101.09 | IC2.8 83.19,73.92 81.92,73.92 | 81.92,73.92 80.65,73.92 | 80.65,73.92 79.5,73.92 79.38,74.04 79.38,75.95 IC2.5 79.38,81.03 | IC2.6 80.65,73.92 | IC2.7 81.92,73.92 | IC2.9 83.19,88.01 81.92,88.01 | IC2.13 77.98,85.76 77.98,86.11 77.98,88.01 79.38,88.01 | 81.92,88.01 80.77,88.01 | 80.77,88.01 79.38,88.01 | IC2.12 79.38,88.01 | IC2.11 80.65,87.89 80.77,88.01 | IC2.10 81.92,88.01 | U1.13 38.48,74.04 arc90 37.85,73.41 37.85,72.39 arc90 38.1,72.14 42.8,72.14 arc-90 42.93,72.01 | 67.06,22.48 66.93,22.61 | U1.8 47.37,79.12 arc-90 48.01,78.49 arc90 49.02,77.47 JP3.6 53.47,75.95
  Top 0.406: 81.03,22.74 arc90 80.39,22.1 arc90 79.76,22.74 | 50.4,22.58 50.29,22.48 arc90 49.91,22.1 U6.8 | 45.47,22.58 arc-90 44.83,23.22 U6.13 | 22.61,41.66 arc-90 21.97,41.02 arc-90 22.61,40.39 | 23.24,76.58 arc90 22.61,75.95 | 21.97,71.5 arc90 22.61,72.14 | 40.39,98.81 arc90 41.02,99.44 arc-90 40.39,98.81 | 71.5,99.44 arc90 72.14,98.81 arc-90 71.5,99.44 | 76.84,98.81 arc90 76.58,98.55 | 98.94,49.66 99.19,49.91 U8.8 | 98.94,45.34 arc-90 98.55,44.96 98.43,44.83 U8.13 | 98.84,80.52 98.81,80.52 | 98.81,80.52 98.81,81.67 | 98.81,80.52 98.81,76.2 arc-90 98.05,75.44 | 98.81,80.52 arc90 98.92,80.41 100.08,80.41 | U4.8 21.97,71.5 | 21.97,71.5 arc-90 22.61,70.87 | 25.15,76.58 U4.13 | 75.31,23.37 74.68,22.74 arc-90 74.42,22.48 | 80.39,20.07 U7.8 | U3.13 46.1,96.27 | U9.8 71.5,99.44 | 75.95,98.81 arc-90 76.58,98.17 U9.13 | 41.66,58.17 arc-90 41.02,57.53 | 41.66,61.47 arc-90 42.67,62.49 44.33,62.49 arc90 U2.8 | U1.8 arc90 42.93,77.59 42.93,72.01 | C5.2 37.85,22.53 | C6.2 22.55,39.06 arc-90 22.61,39.12 | C7.2 arc-90 22.61,67.51 22.61,67.06 | U3.8 41.02,101.35 | 40.39,98.81 38.16,98.81 arc-90 C8.2 | 84.84,22.74 arc-90 84.78,22.67 C9.2 | C10.1 arc90 98.94,53.54 98.94,51.82 | 97.77,82.57 97.65,82.57 arc-90 96.9,83.31 | 98.5,81.94 arc-90 96.9,83.53 96.9,83.57 | C11.1 96.96,83.29 arc90 97.14,83.11 | 23.24,46.1 arc90 22.61,45.47 arc-90 23.24,46.1 | 45.98,98.81 arc-90 46.1,98.68 arc90 45.98,98.81
  Top 0.508: U10.13 97.92,75.31 arc90 98.81,76.2 | 98.81,80.52 101.48,80.52 arc-90 U10.8 | U7.13 75.31,23.37 arc-90 74.68,22.74 | 79.76,22.74 arc-90 80.39,22.1 80.39,20.07 | U6.13 44.83,23.22 arc-90 44.2,22.58 | 22.61,46.74 arc90 23.24,46.1 U5.13 | 22.61,41.66 arc-90 21.97,41.02 U5.8 | 22.61,75.95 arc-90 23.24,76.58 25.15,76.58 | 46.1,98.68 46.1,96.27 | 40.39,98.81 arc90 41.02,99.44 41.02,101.35 | IC2.12 79.38,82.3 | 79.38,82.3 79.38,81.03 | 79.38,81.03 79.38,75.95 | R7.2 78.74,81.66 | 78.74,81.66 arc-90 79.38,81.03 | 78.74,81.66 arc90 79.38,82.3 | 61.57,82.3 arc-90 R7.1 | 77.98,86.11 77.98,86.62 arc90 75.82,88.78 73.92,88.78 arc-90 71.38,91.32 71.38,93.54 arc90 C12.1 71.06,94.62 70.74,94.94 70.74,98.94
  Top 0.61: 67.06,45.19 S2.1 S3.2 S3.1 S4.2 S4.1 arc-90 41.66,45.75 41.66,58.17 | 68.33,45.19 S2.2 S1.1 S1.2 | U2.8 42.8,62.61 arc90 41.66,61.47 41.66,58.17 | U2.13 41.02,57.53 arc90 41.66,58.17
  Top 1.016: 24,15.72 24.29,15.46 25.02,14.84 D40.K D41.K D42.K D43.K D44.K D45.K D46.K D47.K D48.K D49.K D50.K D51.K D52.K D53.K arc45 99.8,17.25 101.98,19.43 | 24,15.72 23.79,15.9 23.66,16.01 D39.K 22.39,17.02 arc-45 20.59,17.76 17.76,20.59 arc-45 17.02,22.39 D38.K D37.K D36.K D35.K D34.K D33.K 3.04,51.73 | 3.04,51.73 | 3.04,51.73 D32.K D31.K D30.K D29.K D28.K D27.K D26.K D25.K 15.53,97.1 | 15.53,97.1 D24.K 17.02,99.03 arc-45 17.76,100.82 20.59,103.65 arc-45 22.39,104.4 D23.K D22.K D21.K D20.K D19.K D18.K D17.K 56.91,118.97 58.17,119.02 | 102.62,20.07 103.95,21.4 arc45 D54.K D55.K D56.K D57.K D58.K D59.K D60.K 119.02,58.17 arc-90 119.02,58.17 99.95,58.17 arc90 98.94,57.15 98.94,51.82 98.94,49.66 98.94,45.34 | 102.62,20.07 101.98,19.43 | 58.17,119.02 58.17,107.7 | 58.17,107.7 58.17,106.43 | 15.53,97.1 19.21,94.36 31.37,94.36 arc90 34.04,97.03 arc-90 35.82,98.81 40.39,98.81 45.98,98.81 | 3.04,51.73 14.99,51.82 22.61,51.82 | 22.61,51.82 22.61,67.06 22.61,70.87 22.61,72.14 22.61,75.95 | 24,15.72 27.62,19.79 | 27.62,19.79 30,22.48 | 30,22.48 32.77,22.5 37.85,22.53 | 45.47,22.58 49.28,22.61 | 27.62,24.86 27.62,26.29 arc90 25.08,28.83 arc-90 23.75,30.16 23.75,35.82 arc90 23.24,36.32 arc-90 22.61,36.96 22.61,39.12 22.61,40.39 22.61,41.66 22.61,45.47 22.61,46.74 22.61,51.82 | 27.62,24.86 27.62,19.79 | 27.62,24.86 arc90 30,22.48 | 58.17,107.7 65.79,107.7 | 65.79,107.7 68.33,107.7 arc-90 69.6,106.43 69.6,101.35 | 69.6,101.35 69.6,100.08 70.74,98.94 arc90 70.87,98.81 72.14,98.81 75.95,98.81 76.84,98.81 | 65.79,107.7 C1.2 | 69.6,101.35 arc-90 69.34,101.09 C4.2 | 102.62,20.07 101.35,20.07
  Top 1.016: 101.98,19.43 96.9,24.51 88.01,24.51 arc90 87.38,23.88 arc-90 86.24,22.74 84.84,22.74 81.03,22.74 79.76,22.74 74.68,22.74 | 74.42,22.48 70.87,22.48 | 70.87,22.48 67.06,22.48 63.25,22.48 arc90 61.09,20.32 arc-90 59.57,18.8 59.44,18.8 arc90 59.39,18.85 53.04,18.85 arc-90 51.18,20.7 51.18,21.59 arc90 50.29,22.48 | 50.4,22.58 45.47,22.58 | D1.K D2.K D3.K D4.K D5.K 114.05,83.57 D6.K D7.K D8.K arc45 103.64,100.33 101.35,102.62 | 101.35,102.62 100.33,103.64 arc45 D9.K D10.K D11.K D12.K D13.K D14.K D15.K D16.K 58.17,119.02 | 101.35,102.62 101.35,101.86 96.9,96.88 96.9,83.57 96.9,83.31 97.14,83.11 98.5,81.94 98.81,81.67 arc-90 98.84,81.63 98.84,80.52 98.84,76.24 arc-90 98.81,76.2 | C5.2 arc90 38.19,22.58 44.2,22.58 45.47,22.58 | S1.2 68.33,45.19 67.06,45.19 S4.1 42.22,60.71 | 42.22,60.71 42.22,60.91 arc90 41.66,61.47 | 42.22,60.71 arc-90 41.66,61.27 41.66,70.87 arc-90 42.8,72.01 42.93,72.01 | 70.87,22.48 arc-90 70.48,22.09 69.6,22.09 arc-90 68.85,21.34 67.81,21.34 arc-90 67.06,22.09
  pour Top (isolate 0.813): 8.64,89.92 3.56,75.95 2.29,55.63 6.1,40.39 13.72,25.15 25.15,13.72 39.12,6.1 55.63,2.29 68.33,2.29 82.3,6.1 95,12.45 105.16,21.34 114.05,35.31 118.37,49.02 119.64,60.45 118.75,69.34 115.45,81.92 109.22,93.22 104.02,99.06 102.11,102.11 95,107.57 84.08,114.3 70.61,118.11 59.57,119 46.61,117.35 34.55,112.65 26.67,107.95 18.04,101.09
MISO
  Top 0.305: JP3.1 58.55,90.52 arc-90 IC3.16
MOSI
  Top 0.305: IC3.15 arc90 57.28,90.05 57.28,80.9 55.88,79.5 55.88,77.6 arc-90 JP3.4
N$1
  Top 0.305: U2.14 37.85,56.26 arc-90 34.93,59.18 34.93,73.92 arc90 34.55,74.3 33.28,74.3 33.28,78.62 arc-90 33.78,79.12 U1.9
N$2
  Top 0.406: U9.14 77.85,95 arc90 79.12,93.73 86.11,93.73 arc-90 89.66,90.17 89.66,83.19 arc90 92.46,80.39 U10.9
N$3  (via drill 0.7)
  other vias: 53.98,21.72
N$4
  Top 0.305: U10.15 96.27,72.77 arc-90 98.81,70.23 98.81,69.6 arc90 100.08,68.33 105.16,68.33 arc-90 107.7,65.79 107.7,63.25 arc90 110.24,60.71 R8.2
N$5
  Top 0.305: R9.2 110.62,66.68 arc-90 108.97,68.33 108.97,68.96 arc90 106.43,71.5 U10.1
N$6
  Top 0.305: R10.2 arc90 110.69,72.77 U10.2
N$7
  Top 0.305: R11.2 108.33,78.23 arc90 106.94,76.84 arc-90 104.14,74.04 U10.3
N$8
  Top 0.305: R12.2 106.17,83.82 arc90 105.92,83.57 105.92,78.36 arc-90 102.87,75.31 U10.4
N$9
  Top 0.305: 104.14,87.63 R13.2 arc-90 105.05,87.42 105.05,80.03 arc-90 U10.5
N$10
  Top 0.406: U7.9 80.39,25.78 arc-90 82.3,27.69 92.46,27.69 arc90 94.49,29.72 94.49,42.05 arc-90 U8.14
N$11
  Top 0.406: U7.14 arc90 71.51,27.94 52.07,27.94 arc90 49.91,25.78 U6.9
N$12
  Top 0.406: U5.9 26.42,41.02 arc-90 28.96,38.48 28.96,31.88 arc90 31.5,29.34 41.02,29.34 arc-90 42.29,28.07 arc90 43.06,27.31 arc-90 43.56,26.8 U6.14
N$13
  Top 0.406: U5.14 arc90 28.58,50.54 28.58,68.33 arc90 U4.9
N$14
  Top 0.406: U4.14 arc90 28.2,80.64 28.2,89.92 | 28.96,91.19 35.31,91.19 arc90 36.58,92.46 arc-90 38.36,94.24 39.63,94.24 arc90 41.02,95.63 U3.9
  Top 0.508: 28.96,91.19 arc90 28.2,90.43 28.2,89.92
N$15
  Top 0.305: U10.6 arc90 104.27,80.51 104.27,85.73 arc90 103.89,86.11 arc-90 102.62,87.38 102.62,91.38 arc90 R14.2
N$16
  Top 0.305: R15.2 99,93.47 100.97,91.51 100.97,87.38 100.97,87 100.97,86.36 arc90 101.86,85.47 101.98,85.47 arc-90 103.38,84.08 | 103.38,84.46 103.38,84.08 | 103.38,84.08 103.38,80.27 arc-90 102.24,79.12 U10.7
N$17
  Top 0.305: R16.2 95.51,98.17 arc-90 94.24,96.9 89.03,96.9 arc-90 87.76,98.17 87.76,99.19 arc90 87,99.95 80.65,99.95 arc90 79.12,98.43 U9.15
N$18
  Top 0.406: Q2.B arc-90 66.07,63.38 R2.2
  Top 0.813: 66.07,63.38 arc90 Q2.B
N$19
  Top 0.406: Q3.B 59.25,61.56 arc90 R3.2
  Top 0.813: Q3.B 59.28,63.39
N$20
  Top 0.406: Q4.B 54.75,64.23 R4.2
N$21
  Top 0.406: Q5.B arc-90 55.35,58.04 R5.2
  Top 0.813: Q5.B arc-90 55.51,58.2
N$22
  Top 0.305: U9.1 arc-90 80.45,101.67 arc90 U9.1 | R17.2 92.71,100.33 arc-90 92.46,100.08 89.66,100.08 arc-90 89.03,100.71 89.03,101.6 arc90 88.01,102.62 80.77,102.62 arc90 80.39,102.24 U9.1
N$23
  Top 0.305: U9.2 79.12,102.43 arc-90 80.33,103.63 88.52,103.63 arc90 89.16,104.27 R18.2
N$24
  Top 0.305: R19.2 83.95,106.56 arc-90 83.19,105.79 78.74,105.79 arc90 77.85,104.9 U9.3
N$25
  Top 0.305: R20.2 78.23,107.06 arc-90 77.6,106.43 77.09,106.43 arc90 76.58,105.92 U9.4
N$26
  Top 0.305: R21.2 arc-90 75.31,109.03 U9.5
N$27
  Top 0.305: U9.6 74.04,107.7 arc90 71.5,110.24 68.39,110.24 arc-90 R22.2
N$28
  Top 0.305: U9.7 72.77,106.43 arc90 70.23,108.97 63.25,108.97 arc-90 60.71,111.51 R23.2
N$29
  Top 0.305: R24.2 54.74,110.62 arc-90 53.09,108.97 arc90 51.82,107.7 51.82,101.35 arc-90 49.28,98.81 arc90 48.64,98.17 U3.15
N$30
  Top 0.305: R25.2 48.64,109.6 arc90 49.28,108.97 arc-90 49.91,108.33 U3.1
N$31
  Top 0.305: R26.2 43.06,108.97 arc90 43.56,108.46 48.01,108.46 arc-90 48.64,107.83 U3.2
N$32
  Top 0.305: R27.2 38.36,107.19 arc90 39.12,106.43 39.63,106.43 arc90 40.13,106.94 arc-90 40.9,107.7 46.74,107.7 arc-90 47.37,107.06 U3.3
N$33
  Top 0.305: R28.2 33.15,104.14 arc90 33.53,103.76 34.04,103.76 arc90 34.8,104.52 arc-90 35.94,105.67 45.47,105.67 arc-90 46.1,105.03 U3.4
N$34
  Top 0.305: R29.2 28.83,101.6 arc90 29.59,100.84 29.72,100.84 arc90 30.23,101.35 arc-90 31.5,102.62 34.04,102.62 arc90 35.31,103.89 arc-90 35.94,104.52 44.33,104.52 arc-90 44.83,104.02 U3.5
N$35
  Top 0.305: U3.6 43.56,102.75 arc90 42.67,103.63 36.83,103.63 arc90 36.07,102.87 arc-90 34.8,101.6 32.01,101.6 arc90 31.37,100.97 31.37,98.55 arc-90 30.36,97.54 25.78,97.54 arc-90 25.15,98.17 25.15,98.75 arc-90 R30.2
N$36
  Top 0.305: U3.7 arc90 41.16,102.75 37.59,102.75 | 37.59,102.75 37.47,102.75 | 37.59,102.75 arc90 36.83,101.98 arc-90 35.56,100.71 33.02,100.71 arc90 32.39,100.08 32.39,98.68 arc-90 30.23,96.52 R31.2
N$37
  Top 0.305: R32.2 20.96,91.44 arc-90 22.61,89.79 22.61,81.03 arc90 24.51,79.12 U4.15
N$38
  Top 0.305: U4.1 19.56,80.39 arc-90 18.42,81.54 18.42,86.17 arc90 R33.2
N$39  (1 unrouted)
  Top 0.305: U4.2 18.16,79.12 arc-90 16.26,81.03 arc90 13.72,83.57
N$40
  Top 0.305: U4.3 17.02,77.85 arc-90 16.77,78.11 arc90 16.51,78.36 R35.2
N$41
  Top 0.305: U4.4 16.89,76.58 arc90 14.99,74.68 arc-90 12.83,72.52 R36.2
N$42
  Top 0.305: U4.5 18.8,75.31 arc90 16.26,72.77 16.26,69.22 arc-90 13.72,66.68 R37.2
N$43
  Top 0.305: U4.6 arc90 17.53,71.76 17.53,63.25 arc-90 14.99,60.71 R38.2 8.64,60.71
N$44
  Top 0.305: U4.7 arc90 18.8,71.76 18.8,57.28 arc-90 16.64,55.12 R39.2
N$45
  Top 0.305: U6.1 arc90 40.13,20.7 32.45,20.7 arc90 R47.2
N$46
  Top 0.305: R40.2 13.21,48.64 arc90 13.59,49.02 arc-90 14.48,49.91 U5.1
N$47
  Top 0.305: U5.2 16.89,48.64 arc90 14.35,46.1 14.35,45.47 arc-90 11.94,43.06 R41.2
N$48
  Top 0.305: R42.2 14.1,37.47 arc90 15.24,38.61 15.24,44.83 arc-90 17.78,47.37 U5.3
N$49
  Top 0.305: R43.2 16.95,32.39 arc90 17.94,33.37 arc90 16.64,34.67 16.77,34.67 arc-90 16.13,35.31 16.13,43.56 arc-90 18.67,46.1 U5.4
N$50
  Top 0.305: R44.2 19.75,28.58 arc90 20.96,29.79 20.96,33.78 arc90 19.69,35.05 18.42,35.05 arc-90 16.89,36.58 16.89,42.29 arc-90 19.43,44.83 U5.5
N$51
  Top 0.305: R45.2 22.86,25.02 arc90 23.75,25.91 arc90 22.61,27.05 arc-90 21.72,27.94 21.72,33.66 arc90 19.56,35.82 18.67,35.82 arc-90 17.53,36.96 17.53,41.28 arc-90 U5.6
N$52
  Top 0.305: U5.7 19.18,42.29 arc90 18.29,41.4 18.29,37.59 arc90 19.31,36.58 19.69,36.58 arc-90 22.48,33.78 22.48,28.32 arc90 23.37,27.43 arc-90 25.15,25.66 R46.2
N$53
  Top 0.305: U6.2 arc-90 40.01,17.53 35.76,17.53 arc90 R48.2
N$54
  Top 0.305: U6.3 43.56,18.16 arc-90 41.66,16.26 40.77,16.26 arc90 38.23,13.72 R49.2
N$55
  Top 0.305: R50.2 42.93,14.35 arc-90 43.69,15.12 arc90 44.83,16.26 U6.4
N$56
  Top 0.305: R51.2 48.77,10.42 arc90 48.01,11.18 arc-90 46.1,13.08 U6.5
N$57
  Top 0.305: R52.2 54.74,9.91 arc90 52.45,12.19 49.53,12.19 arc-90 47.37,14.35 U6.6
N$58
  Top 0.305: R53.2 60.58,10.04 arc90 57.28,13.34 51.56,13.34 arc-90 48.64,16.26 U6.7
N$59
  Top 0.305: R54.2 66.68,10.8 arc-90 68.33,12.45 68.96,12.45 arc90 71.5,14.99 U7.1
N$60
  Top 0.305: R55.2 arc90 72.77,10.1 U7.2
N$61
  Top 0.305: R56.2 78.23,11.43 arc90 75.95,13.72 arc-90 74.04,15.62 U7.3
N$62
  Top 0.305: R57.2 arc90 82.61,14.99 76.2,14.99 arc-90 75.31,15.88 U7.4
N$63
  Top 0.305: R58.2 89.03,17.15 arc90 88.39,17.78 88.01,17.78 arc90 86.87,16.64 86.87,16.51 arc-90 86.11,15.75 | U7.5 76.58,16.39 arc90 77.22,15.75 86.11,15.75 | 86.24,15.75 86.11,15.75
N$64
  Top 0.305: R59.2 92.46,21.34 arc90 92.2,21.59 90.55,21.59 arc90 89.79,20.83 89.79,20.32 arc-90 88.27,18.8 87.38,18.8 arc90 86.24,17.66 arc-90 85.22,16.64 79.38,16.64 arc-90 77.98,18.04 77.98,19.68 arc90 U7.6
N$65
  Top 0.305: R60.2 95.51,23.37 arc90 95.38,23.5 94.11,23.5 arc90 93.86,23.24 arc-90 92.97,22.35 90.43,22.35 arc90 89.03,20.96 89.03,20.7 arc-90 87.89,19.56 86.49,19.56 arc90 85.47,18.54 arc-90 84.71,17.78 79.38,17.78 arc-90 79,18.16 79,19.18 arc-90 79.25,19.43 | 79.25,19.18 79.25,19.43 | 79.25,19.43 79.25,19.68 arc90 U7.7
N$66
  Top 0.305: U8.1 101.61,39.38 arc-90 101.22,38.99 99.95,38.99 arc90 99.32,38.36 99.32,26.67 R61.2
N$67
  Top 0.305: 101.98,42.29 U8.2 102.11,42.29 arc-90 103.38,41.02 103.38,37.47 arc-90 102.36,36.45 arc90 100.97,35.05 100.97,30.61 arc90 102.24,29.34 R62.2
N$68
  Top 0.305: R63.2 103.38,33.28 arc-90 102.62,34.04 102.62,34.8 arc-90 103.51,35.69 arc90 104.27,36.45 104.27,41.02 arc90 101.73,43.56 U8.3
N$69
  Top 0.305: R64.2 106.81,37.47 arc-90 105.16,39.12 105.16,42.29 arc90 102.62,44.83 U8.4
N$70
  Top 0.305: R65.2 107.57,43.06 arc-90 106.3,44.33 arc90 104.52,46.1 U8.5
N$71
  Top 0.305: R66.2 109.6,48.64 arc90 108.97,48.01 arc-90 108.33,47.37 U8.6
N$72
  Top 0.305: R67.2 109.22,54.61 arc90 107.7,53.09 107.7,51.18 arc-90 105.16,48.64 U8.7
N$73
  Top 1.016: D1.A R8.1
N$74
  Top 1.016: D2.A R9.1
N$75
  Top 1.016: D4.A R11.1
N$76
  Top 1.016: D3.A R10.1
N$77
  Top 1.016: D7.A 105.67,93.16 arc-90 R14.1
N$78
  Top 1.016: D5.A R12.1
N$79
  Top 1.016: D6.A arc-90 107.32,87.63 R13.1
N$80
  Top 1.016: D8.A 101.73,95.57 arc-90 R15.1
N$81
  Top 1.016: D9.A 96.33,101.73 arc90 R16.1
N$82
  Top 1.016: D12.A R19.1
N$83
  Top 1.016: D15.A R22.1
N$84
  Top 1.016: D17.A R24.1
N$85
  Top 1.016: D18.A R25.1
N$86
  Top 1.016: D19.A R26.1
N$87
  Top 1.016: D10.A arc90 92.71,104.02 R17.1
N$88
  Top 1.016: D13.A R20.1
N$89
  Top 1.016: D11.A R18.1
N$90
  Top 1.016: D16.A R23.1
N$91
  Top 1.016: D14.A R21.1
N$92
  Top 1.016: R30.1 arc90 24.19,101.86 D23.A
N$93
  Top 1.016: D22.A 27.11,105.67 arc-90 R29.1
N$94
  Top 1.016: R28.1 33.15,107.95 arc90 D21.A
N$95
  Top 1.016: D20.A arc-90 38.36,110.75 R27.1
N$96
  Top 1.016: R31.1 arc-90 19.56,97.86 D24.A
N$97
  Top 1.016: R32.1 arc-90 15.75,92.52 D25.A
N$98
  Top 1.016: R33.1 13.34,88.27 arc-90 D26.A
N$99
  Top 1.016: R34.1 10.16,83.44 arc-90 D27.A
N$100
  Top 1.016: R35.1 D28.A
N$101
  Top 1.016: R36.1 D29.A
N$102
  Top 1.016: R37.1 D30.A
N$103
  Top 1.016: R38.1 D31.A
N$104
  Top 1.016: R39.1 5.46,55.12 D32.A
N$105
  Top 1.016: R40.1 D33.A
N$106
  Top 1.016: R41.1 D34.A
N$107
  Top 1.016: R42.1 D35.A
N$108
  Top 1.016: R43.1 12.7,32.39 arc90 D36.A
N$109
  Top 1.016: R44.1 17.27,28.58 arc90 D37.A
N$110
  Top 1.016: R45.1 arc90 19.56,23.94 D38.A
N$111
  Top 1.016: R46.1 arc-90 23.18,19.56 D39.A
N$112
  Top 1.016: R47.1 arc-90 29.27,15.62 D40.A
N$113
  Top 1.016: R48.1 arc-90 32.45,12.32 D41.A
N$114
  Top 1.016: R49.1 38.23,10.54 arc-90 D42.A
N$115
  Top 1.016: D43.A R50.1
N$116
  Top 1.016: D44.A R51.1
N$117
  Top 1.016: R52.1 D45.A
N$118
  Top 1.016: D46.A R53.1
N$119
  Top 1.016: D47.A R54.1
N$120
  Top 1.016: D48.A R55.1
N$121
  Top 1.016: D49.A R56.1
N$122
  Top 1.016: D50.A 83.95,11.5 arc-90 R57.1
N$123
  Top 1.016: D51.A arc-90 89.03,12.45 R58.1
N$124
  Top 1.016: D52.A arc-90 92.46,17.53 R59.1
N$125
  Top 1.016: D53.A 96.46,19.43 arc-90 R60.1
N$126
  Top 1.016: D54.A 101.86,26.1 arc90 R61.1
N$127
  Top 1.016: D55.A 105.67,27.88 arc90 R62.1
N$128
  Top 1.016: D56.A arc90 108.08,33.28 R63.1
N$129
  Top 1.016: D57.A R64.1
N$130
  Top 1.016: D60.A R67.1
N$131
  Top 1.016: D59.A R66.1
N$132
  Top 1.016: D58.A R65.1
N$134  (via drill 0.7)
  other vias: 68.2,21.85
N$135
  Top 0.305: IC3.30 68.26,94.93 JP6.1
N$136
  Top 0.305: IC3.31 67.58,95.69 68.18,95.69 68.73,96.25 68.73,97.06 67.69,98.1 JP5.1
N$138
  Top 0.61: R85.2 64.52,36.58 | 64.52,36.58 R84.1 | 64.52,36.58 arc-90 63.53,37.57 63.53,39.68 arc90 S2.3 S2.4
N$139
  Top 0.61: R86.2 54.36,36.58 | 54.36,36.58 R85.1 | 54.36,36.58 arc-90 53.37,37.57 53.37,40.39 arc90 53.09,40.67 | S3.3 53.09,40.67 | 53.09,40.67 S3.4
N$140
  Top 0.61: R86.1 45.47,36.58 45.04,36.58 44.76,36.58 arc-90 42.22,39.12 S4.3 S4.4
RESET  (1 unrouted)
  Top 0.305: IC3.29 66.19,94.13 65.79,93.73 65.79,91.19 67.37,89.6 R1.1 | JP3.5 53.72,82.3
SCK  (1 unrouted)
  Top 0.305: IC3.17 arc90 60.07,89.06 60.07,80.65 59.51,80.09 57.86,80.09 57.28,79.5 57.28,75.77 56.64,75.14 55.5,75.14 54.82,75.82 54.82,79.72 55.63,80.53 55.63,82.3
SCL
  Top 0.152: 74.3,86.52 IC2.16
  Top 0.305: IC3.28 68.86,93.33 arc-90 69.98,92.2 69.98,90.68 arc90 72.52,88.14 73.28,88.14 arc-90 74.3,87.12 74.3,86.52
SDA
  Top 0.152: 75.57,84.46 75.57,84.58 IC2.15
  Top 0.305: IC3.27 68.39,92.53 arc-90 69.22,91.7 69.22,90.05 arc90 71.76,87.51 72.52,87.51 arc-90 73.41,86.62 73.41,84.46 arc90 74.17,83.7 74.68,83.7 arc90 75.57,84.58
SEC_CLK  (5 unrouted)
  Top 0.305: U3.11 43.56,96.9 arc-90 44.2,97.54 44.96,97.54 arc-90 45.47,97.03 45.47,92.2 arc90 46.48,91.19 50.55,91.19 51.06,91.19 52.33,91.19 arc90 53.34,92.2 53.34,95.13 arc-90 53.98,95.76 58.92,95.76 arc-90 IC3.10
  Top 0.406: U9.11 74.3,95.75 74.3,91.95 arc90 74.42,91.82 85.47,91.82 arc-90 87.38,89.92 87.38,79.28 arc-90 R70.1 87.23,76.86 arc90 87.89,76.2 arc-90 89.66,74.42 89.66,48.64 arc90 90.93,47.37 92.46,47.37 | R70.2 90.55,79.12 91.19,78.49 arc90 91.82,77.85 U10.11 | 30.1,42.42 28.96,43.56 U5.11 29.19,43.56 arc-90 R73.1 arc-90 30.1,42.65 30.1,42.42 | 30.1,42.42 arc-90 30.23,42.29 | 30.1,42.42 30.1,32.39 arc90 32.01,30.48 44.55,30.48 R69.1 | U6.11 47.37,28.93 arc90 R69.2 74.68,28.96 arc90 74.81,28.83 R71.1 | R71.2 77.88,25.43 arc-90 U7.11 | R71.2 arc-90 78.01,28.96 | 29.72,46.74 29.72,71 arc90 29.21,71.5 arc-90 28.96,71.76 R74.1 arc90 28.81,74.04 U4.11 | 29.72,46.74 29.72,46.64 R73.2 29.34,46.36 arc-90 29.72,46.74 | R74.2 29.34,77.12 | 29.34,77.22 29.34,87.76 arc-90 31.5,89.92 42.42,89.92 arc90 43.56,91.06 U3.11 | 92.46,47.37 92.46,34.04 arc-90 91.57,33.15 88.65,33.15 arc90 88.01,32.51 88.01,29.85 arc-90 87.12,28.96 78.01,28.96 | R71.2 arc-90 78.01,28.96 | U8.11 92.46,47.37
  Top 0.508: R74.2 arc90 29.34,77.12 29.34,77.22
SEC_LATCH  (2 unrouted)
  Top 0.305: 44.83,89.66 arc-90 45.34,90.17 52.96,90.17 arc90 54.1,91.32 54.1,94.24 arc-90 54.74,94.87 58.9,94.87 arc90 IC3.11
  Top 0.406: U9.12 75.31,93.73 arc90 76.2,92.84 85.73,92.84 arc-90 88.65,89.92 88.65,77.47 arc90 89.54,76.58 | 89.54,76.58 U10.12 | 45.47,31.5 arc-90 46.1,30.86 U6.12 | 45.47,31.5 32.77,31.5 arc-90 31.12,33.15 31.12,44.2 arc90 30.86,44.45 30.74,44.58 | 45.47,31.5 48.64,31.5 arc-90 49.53,30.61 arc90 50.17,29.97 72.65,29.97 arc90 73.41,30.74 arc-90 74.17,31.5 75.57,31.5 | 75.57,31.5 arc-90 76.58,30.48 U7.12 | 30.74,44.58 30.74,75.06 30.61,75.19 | 30.61,75.19 30.48,75.31 U4.12 | 44.83,89.92 arc-90 43.56,88.65 32.77,88.65 arc90 30.61,86.49 30.61,75.19 | 89.54,76.58 arc-90 90.68,75.44 90.68,50.8 arc90 92.46,49.02 93.98,49.02 R76.2 | 75.57,31.5 R75.1 | R75.2 91.19,31.5 arc90 93.47,33.78 93.47,45.47 | 93.47,45.47 arc-90 94.11,46.1 95.38,46.1 arc90 95.51,46.23 | 95.51,46.23 95.88,46.23 arc-90 U8.12 | 93.73,45.72 arc-90 93.47,45.47 | R76.1 arc-90 94.26,46.23 95.51,46.23 | U3.12 44.83,89.92 | 44.83,89.92 44.83,89.66 | U5.12 30.48,44.83 30.74,44.58
SEC_SER
  Top 0.305: U3.14 47.37,93.09 arc90 48.14,92.33 51.82,92.33 arc90 52.58,93.09 52.58,96.01 arc-90 53.09,96.52 IC3.9 arc90 IC3.9
SEC_SERIAL
  Top 0.305: U8.9 94.74,51.18 94.74,68.21 arc90 94.11,68.84 93.35,68.84 | 93.47,68.71 92.84,68.71 | 95.75,74.3 U10.14
  Top 0.406: U10.14 92.71,74.04 arc90 91.44,72.77 91.44,69.98 arc90 92.59,68.84 93.35,68.84 93.47,68.71
XTAL1
  Top 0.305: Q1.1 63.18,106.11 65.08,104.21 C1.1 64.2,102.62 61.98,102.62 61.25,101.89 IC3.7
XTAL2
  Top 0.305: IC3.8 60.45,103.88 Q1.3 60.78,104.21 C2.1

## Text on the board
Top: 5V | GND